# EAGLE board Z21 MEGA_2 (EAGLE 6.6.0)
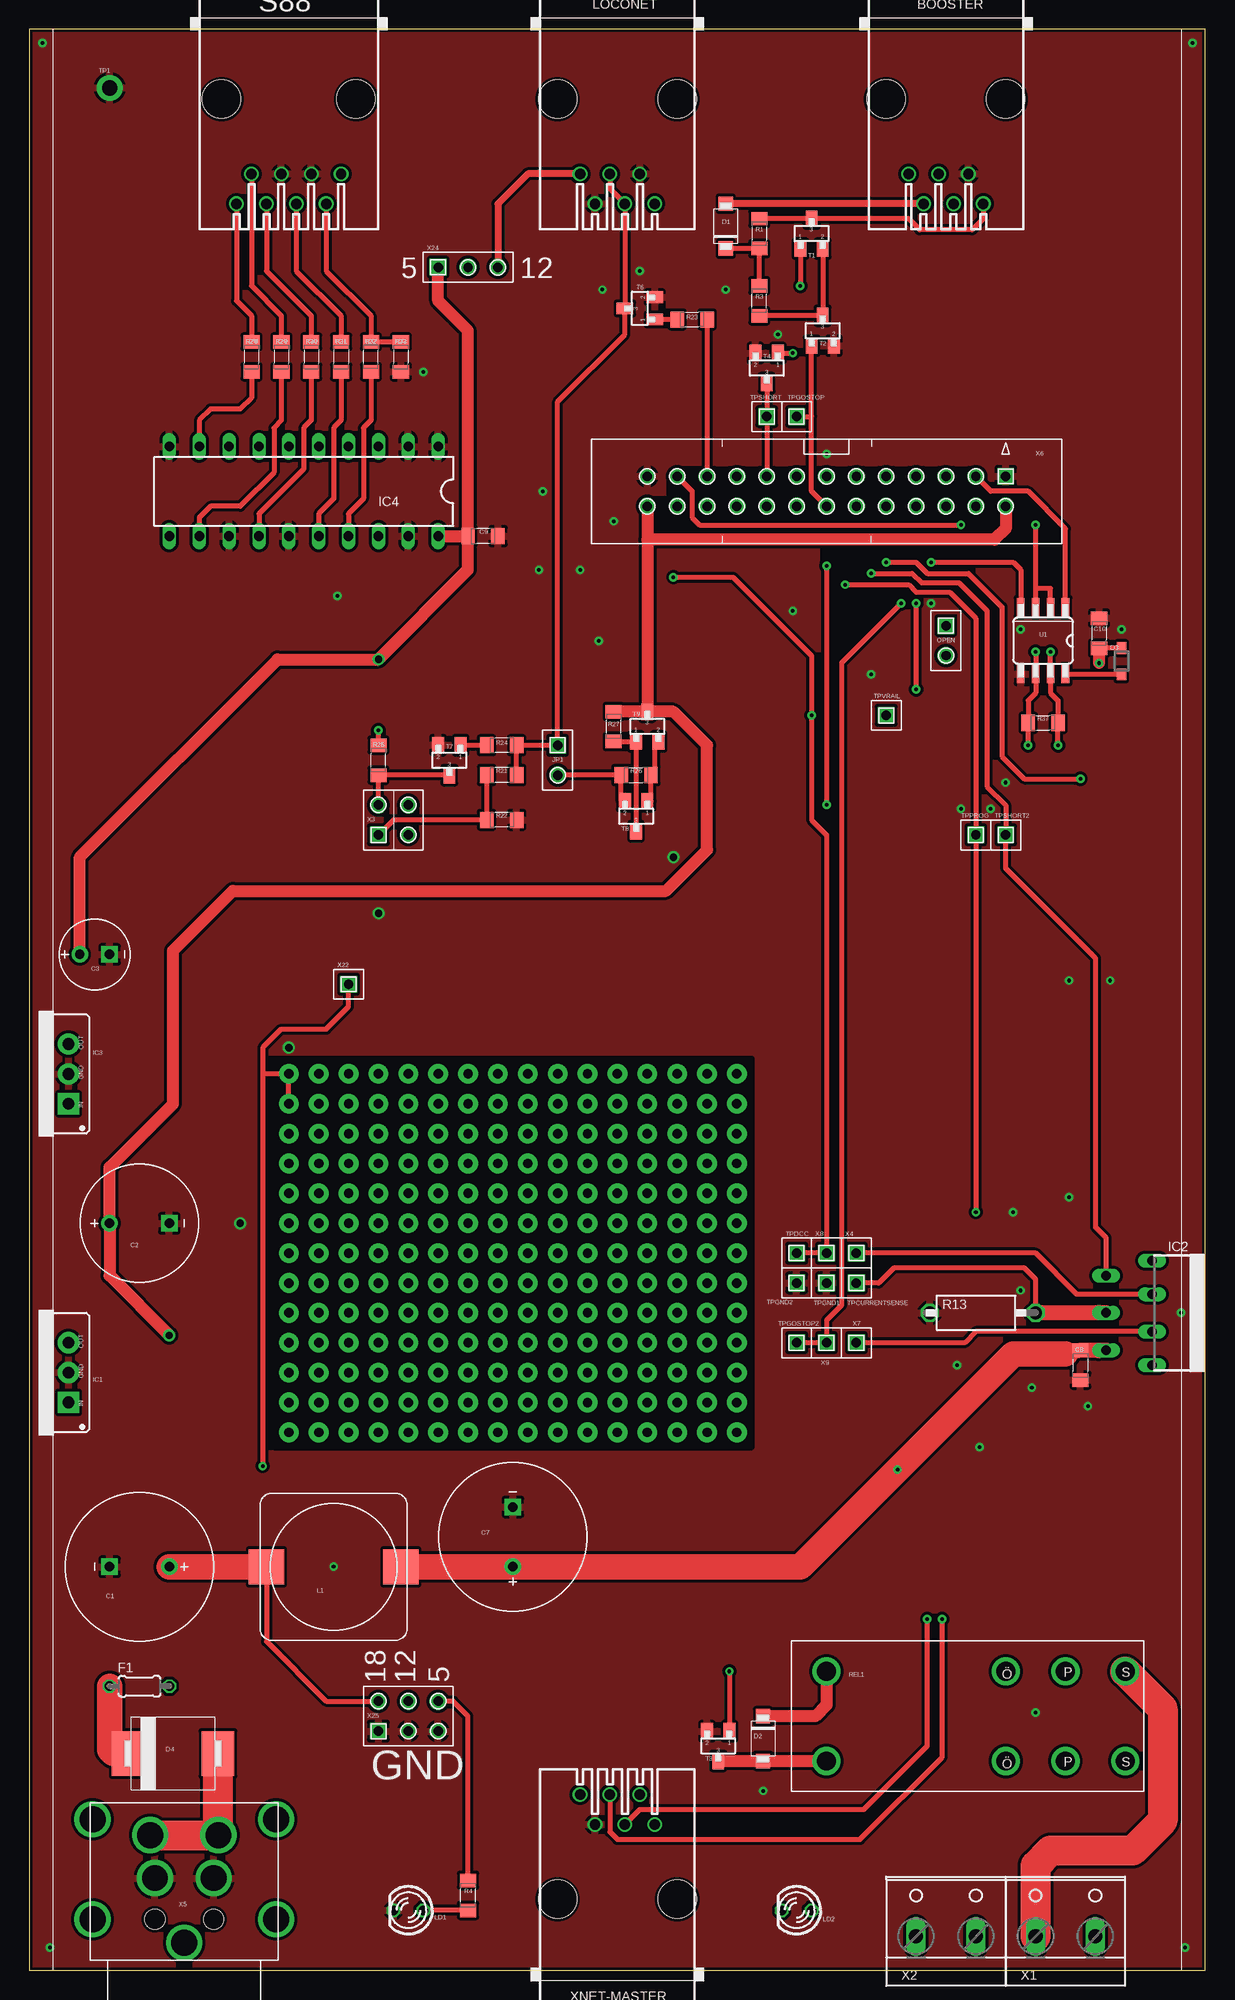
[diagram p0: board, top side]
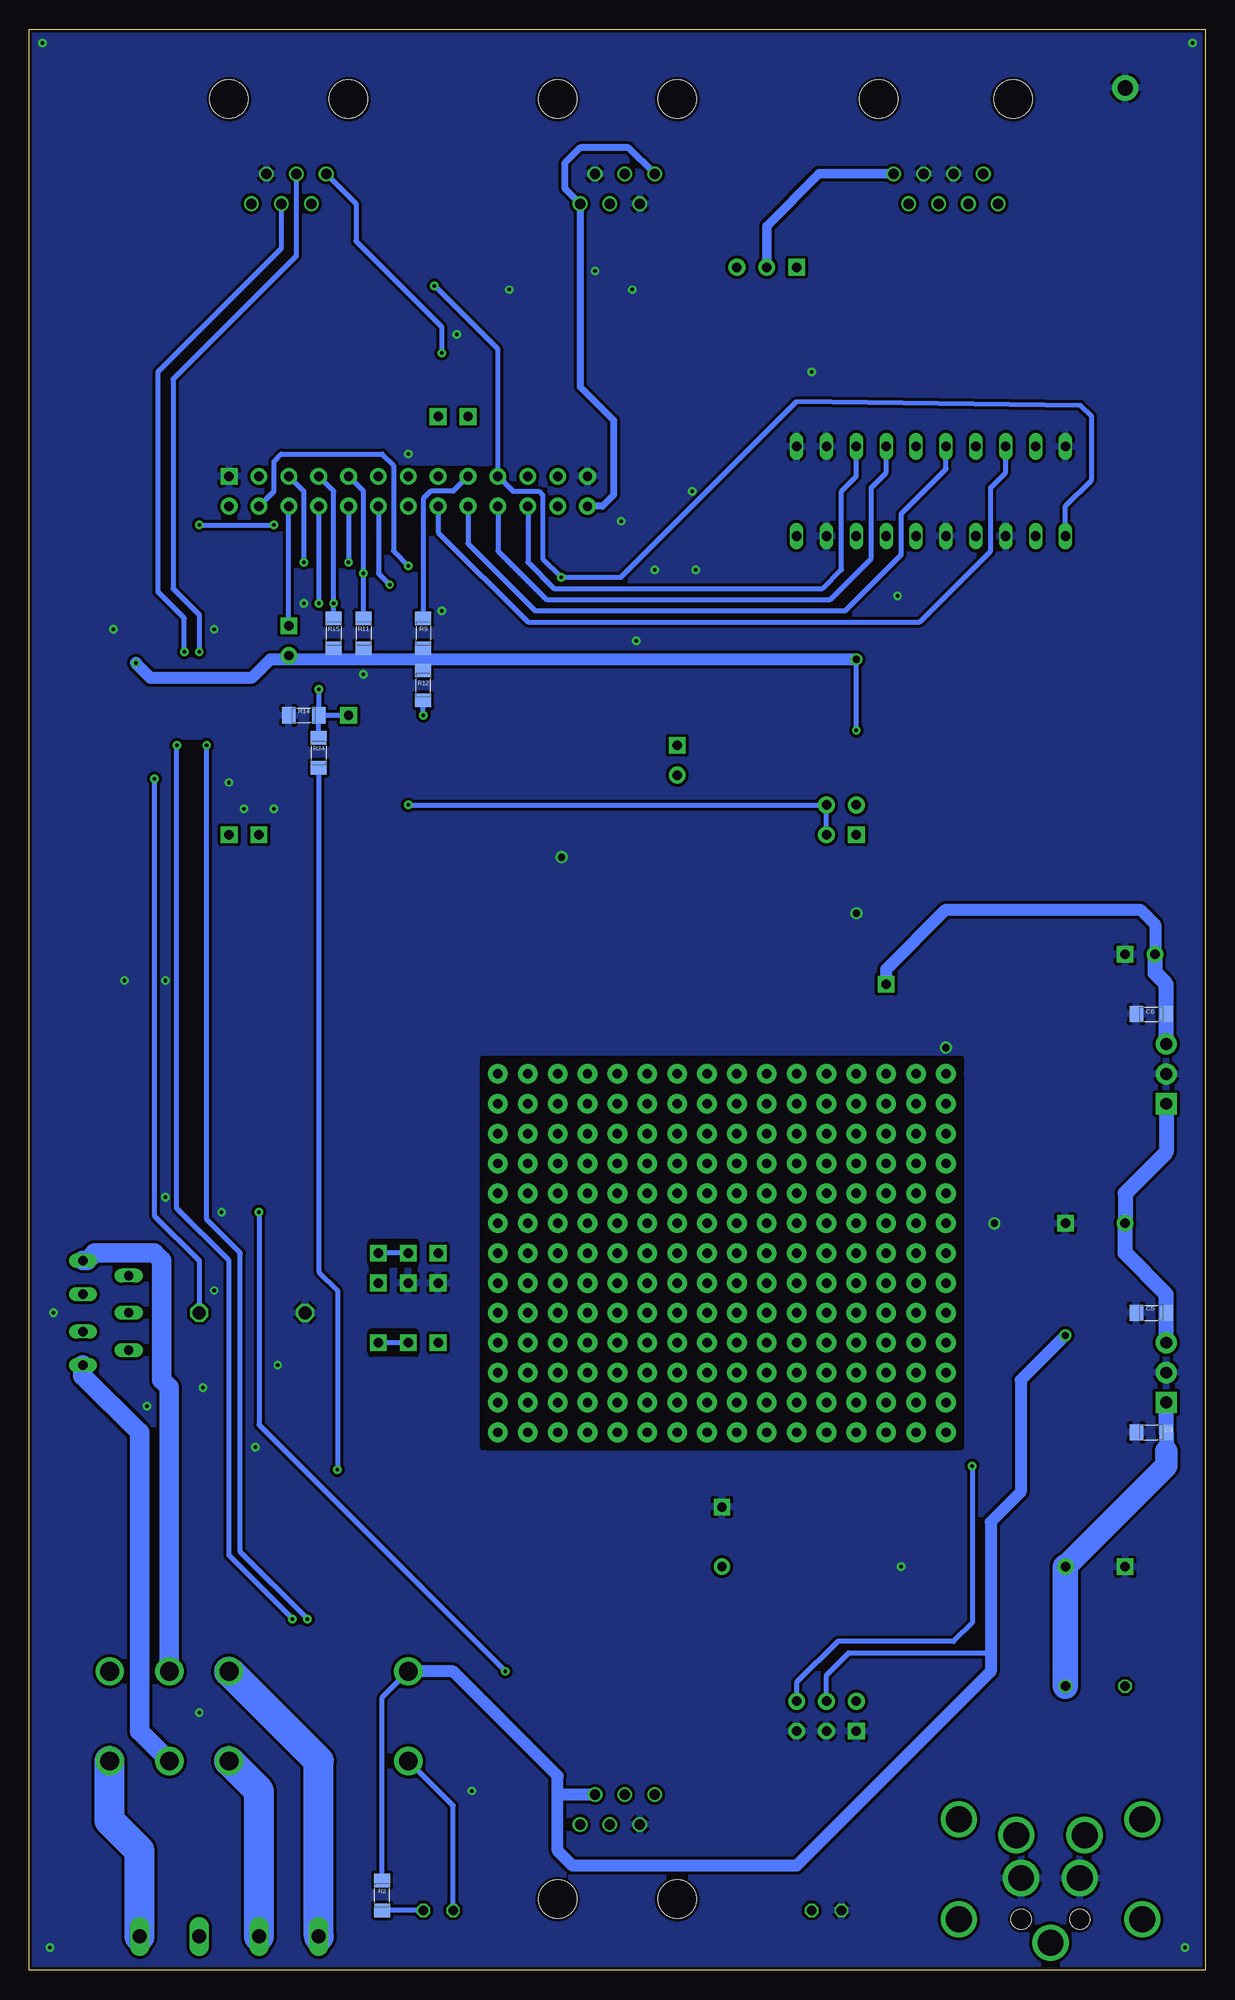
[diagram p1: board, bottom side, seen from below]

Size 100 x 165 mm. Coordinates in mm from the lower left corner, seen from the top.
Outline: 0,0 100,0 100,165 0,165 0,0
Copper layers (1*16): Top 0.035mm / dielectric 1.5mm / Bottom 0.035mm
Design rules "mme-pcb_Doppelseitig": minimum track width 6mil, minimum drill 0.3mm, track to track 6mil, track to pad 6mil, pad to pad 6mil, via to via 6mil, smd to smd 0mil, copper to edge 8mil, drill to drill 8mil, minimum pad ring 6mil, minimum via ring 8mil, stop-mask expansion 4mil, vias tented up to drill 30mil, thermal gap 10mil
tRestrict: 17 lines
bRestrict: 13 lines

## Footprints (pad centres in the part's own frame; a part is rotated, then mirrored left to right if it is on the bottom)
520250-3 = drill 0.889: 1 -3.175,8.89; 2 -1.905,6.35; 3 -0.635,8.89; 4 0.635,6.35; 5 1.905,8.89; 6 3.175,6.35 | hole 3.251: -5.08,0; 5.08,0
RM5_DIA12.5 = drill 0.8 pad 1.4 square: MINUS 0,-2.54 | drill 0.8 pad 1.4: PLUS 0,2.54
RM5_DIA10 = drill 0.8 pad 1.4 square: MINUS 0,-2.54 | drill 0.8 pad 1.4: PLUS 0,2.54
RM2.5_DIA6 = drill 0.8 pad 1.4 square: MINUS 0,0 | drill 0.8 pad 1.4: PLUS 0,2.54
C0805 = smd 1.143 x 1.372: 1 -1.27,0; 2 1.27,0
SUB-SMA_ = smd 1.219 x 1.219: A -1.905,0; K 1.905,0
SOD323_ = smd 1 x 0.8: ANODE 1.111,0; KATHODE -1.111,0
SMC_ = smd 2.8 x 3.8: A 3.81,0; K -3.81,0
0204/5 = drill 0.813 octagon: 1 -2.54,0; 2 2.54,0
78XXS = drill 1 pad 1.8: GND 0,0; OUT 2.54,0 | drill 1 pad 1.8 square: IN -2.54,0
P-TO220-7-11 = drill 0.8 pad 1.2 long: 1 -4.445,-1.85; 2 -3.175,-5.75; 3 -1.587,-1.85; 4 0,-5.75; 5 1.587,-1.85; 6 3.175,-5.75; 7 4.445,-1.85
DIL20 = drill 0.813 long: 1 -11.43,-3.81; 2 -8.89,-3.81; 3 -6.35,-3.81; 4 -3.81,-3.81; 5 -1.27,-3.81; 6 1.27,-3.81; 7 3.81,-3.81; 8 6.35,-3.81; 9 8.89,-3.81; 10 11.43,-3.81; 11 11.43,3.81; 12 8.89,3.81; 13 6.35,3.81; 14 3.81,3.81; 15 1.27,3.81; 16 -1.27,3.81; 17 -3.81,3.81; 18 -6.35,3.81; 19 -8.89,3.81; 20 -11.43,3.81
1X02_2.54MM = drill 0.8 pad 1.422 square: P$1 0,0 | drill 0.8 pad 1.422: P$2 2.54,0
12,5X12,5MM = smd 3 x 3: P$1 0,5.715; P$2 0,-5.715
LED3MM_ = drill 0.813 octagon: A -1.27,0; K 1.27,0
R0805 = smd 1.143 x 1.372: P$1 -1.27,0; P$2 1.27,0
VMTA55 = drill 1.1 octagon: 1 -5.08,0; 2 3.92,0
FINDER_40.527 = drill 1.6 pad 2.4: P1 20.32,-3.81; P2 20.32,3.81; S1 25.4,-3.81; S2 25.4,3.81; SP1 0,3.81; SP2 0,-3.81; Ö1 15.24,-3.81; Ö2 15.24,3.81
520251-4 = drill 0.889: 1 -4.445,6.35; 2 -3.175,8.89; 3 -1.905,6.35; 4 -0.635,8.89; 5 0.635,6.35; 6 1.905,8.89; 7 3.175,6.35; 8 4.445,8.89 | hole 3.251: -5.715,0; 5.715,0
SOT23_ = smd 1 x 1.4: 1 -0.953,-1.27; 2 0.953,-1.27; 3 0,1.27
THT_1.3MM_51.2MIL = drill 1.3 pad 2.2: P$1 0,0
1X01_2.54MM = drill 0.8 pad 1.422 square: P$1 0,0
SO8__ = smd 0.66 x 1.524: 1 -1.905,-2.857; 2 -0.635,-2.857; 3 0.635,-2.857; 4 1.905,-2.857; 5 1.905,2.857; 6 0.635,2.857; 7 -0.635,2.857; 8 -1.905,2.857
W237-132 = drill 1.194 long: 1 -2.54,-0.635; 2 2.54,-0.635
2X02_2.54MM = drill 0.8 pad 1.422 square: P$1 0,0 | drill 0.8 pad 1.422: P$2 0,2.54; P$3 2.54,0; P$4 2.54,2.54
MDINBU4-POWER = drill 2.2 pad 3: 1 2.9,-14.65; 2 -2.9,-14.65; 3 2.5,-11; 4 -2.5,-11; GND@1 0,-5.5; GND@2 7.8,-7.5; GND@3 -7.8,-7.5; GND@4 7.8,-16; GND@5 -7.8,-16 | hole 1.7: 2.5,-7.5; -2.5,-7.5
2X13_WANNE_180° = drill 0.8 pad 1.422 square: P$1 0,0 | drill 0.8 pad 1.422: P$2 0,2.54; P$3 2.54,0; P$4 2.54,2.54; P$5 5.08,0; P$6 5.08,2.54; P$7 7.62,0; P$8 7.62,2.54; P$9 10.16,0; P$10 10.16,2.54; P$11 12.7,0; P$12 12.7,2.54; P$13 15.24,0; P$14 15.24,2.54; P$15 17.78,0; P$16 17.78,2.54; P$17 20.32,0; P$18 20.32,2.54; P$19 22.86,0; P$20 22.86,2.54; P$21 25.4,0; P$22 25.4,2.54; P$23 27.94,0; P$24 27.94,2.54; P$25 30.48,0; P$26 30.48,2.54
1X03_2.54MM = drill 0.8 pad 1.422 square: P$1 0,0 | drill 0.8 pad 1.422: P$2 2.54,0; P$3 5.08,0
2X03_2.54MM = drill 0.8 pad 1.422 square: P$1 0,0 | drill 0.8 pad 1.422: P$2 0,2.54; P$3 2.54,0; P$4 2.54,2.54; P$5 5.08,0; P$6 5.08,2.54

## Placement (x,y rotation side)
BOOSTER  [520250-3]  77.94,159.07 180 top
C1  1000µ  [RM5_DIA12.5]  9.36,34.29 270 top
C2  470µ  [RM5_DIA10]  9.36,63.5 90 top
C3  100µ  [RM2.5_DIA6]  6.82,86.36 90 top
C4  1µ/50V  [C0805]  4.6,45.72 0 bottom
C5  1µ  [C0805]  4.6,55.88 0 bottom
C6  1µ  [C0805]  4.6,81.28 0 bottom
C7  1000µ  [RM5_DIA12.5]  41.11,36.83 180 top
C8  1µ/50V  [C0805]  89.37,51.44 270 top
C9  100n  [C0805]  38.57,121.92 180 top
C10  100n  [C0805]  90.96,113.67 270 top
D1  SS14L  [SUB-SMA_]  59.21,148.27 270 top
D2  SS14L  [SUB-SMA_]  62.38,19.68 90 top
D3  1N4148  [SOD323_]  92.86,111.28 90 top
D4  SK86  [SMC_]  12.22,18.41 0 top
F1  4A  [0204/5]  9.36,24.13 180 top
IC1  7812  [78XXS]  3.33,50.8 90 top
IC2  TLE5206-2  [P-TO220-7-11]  97.31,55.88 270 top
IC3  7805  [78XXS]  3.33,76.2 90 top
IC4  74HC244N  [DIL20]  23.33,125.73 180 top
JP1  1X02_JUMPER_2.54MM  [1X02_2.54MM]  44.92,104.14 270 top
L1  10µH/5,4A  [12,5X12,5MM]  25.87,34.29 270 top
LD1  gn  [LED3MM_]  32.22,5.08 180 top
LD2  ge  [LED3MM_]  65.24,5.08 180 top
LOCONET  [520250-3]  50,159.07 180 top
OPEN  1X02_JUMPER_2.54MM  [1X02_2.54MM]  77.94,114.3 270 top
R1  2,2k  [R0805]  62.06,147.64 270 top
R2  4,7k  [R0805]  70,6.35 90 bottom
R3  10k  [R0805]  62.06,141.92 90 top
R4  1k  [R0805]  37.3,6.35 90 top
R9  10k  [R0805]  66.51,113.67 270 bottom
R11  10k  [R0805]  71.59,113.67 270 bottom
R12  10k  [R0805]  66.51,109.22 90 bottom
R13  0R33 5W  [VMTA55]  80.48,55.88 180 top
R14  4,7k  [R0805]  76.67,106.68 0 bottom
R15  10k  [R0805]  74.13,113.67 270 bottom
R21  100k  [R0805]  40.16,101.6 180 top
R22  47k  [R0805]  40.16,97.79 180 top
R23  100k  [R0805]  56.35,140.34 0 top
R24  10k  [R0805]  40.16,104.14 180 top
R25  470R  [R0805]  29.68,102.87 90 top
R26  47R  [R0805]  51.59,101.6 0 top
R27  10k  [R0805]  49.68,105.73 90 top
R28  47R  [R0805]  18.89,137.16 270 top
R29  47R  [R0805]  21.43,137.16 270 top
R30  47R  [R0805]  23.96,137.16 270 top
R31  47R  [R0805]  26.5,137.16 270 top
R32  47R  [R0805]  29.05,137.16 90 top
R33  10k  [R0805]  31.59,137.16 270 top
R34  100k  [R0805]  75.4,103.5 270 bottom
R37  n.m.  [R0805]  86.19,106.05 0 top
REL1  DIL16_1FINDER_40.527  [FINDER_40.527]  67.78,21.59 0 top
S88  [520251-4]  22.06,159.07 180 top
T1  PDTC143ZT  [SOT23_]  66.51,147.64 0 top
T2  PDTC143ZT  [SOT23_]  67.46,139.38 0 top
T3  PDTC143ZT  [SOT23_]  58.57,19.05 180 top
T4  PDTC143ZT  [SOT23_]  62.7,136.21 180 top
T6  BC847  [SOT23_]  51.91,141.29 90 top
T7  BC847  [SOT23_]  35.71,102.87 180 top
T8  BC847  [SOT23_]  51.59,98.11 180 top
T9  BC847  [SOT23_]  52.54,105.73 0 top
TP1  LÖTPUNKTTHT_1.3MM_51.2MIL  [THT_1.3MM_51.2MIL]  6.82,160.02 0 top
TPCURRENTSENSE  1X01_2.54MM  [1X01_2.54MM]  70.32,58.42 180 top
TPDCC  1X01_2.54MM  [1X01_2.54MM]  65.24,60.96 0 top
TPGND1  1X01_2.54MM  [1X01_2.54MM]  67.78,58.42 180 top
TPGND2  1X01_2.54MM  [1X01_2.54MM]  65.24,58.42 180 top
TPGOSTOP  1X01_2.54MM  [1X01_2.54MM]  65.24,132.08 0 top
TPGOSTOP2  1X01_2.54MM  [1X01_2.54MM]  65.24,53.34 0 top
TPPROG  1X01_2.54MM  [1X01_2.54MM]  80.48,96.52 0 top
TPSHORT  1X01_2.54MM  [1X01_2.54MM]  62.7,132.08 0 top
TPSHORT2  1X01_2.54MM  [1X01_2.54MM]  83.02,96.52 0 top
TPVRAIL  1X01_2.54MM  [1X01_2.54MM]  72.86,106.68 0 top
U1  SP485  [SO8__]  86.19,113.03 180 top
X1  PROG OUT  [W237-132]  88.1,3.49 0 top
X2  TRACK OUT  [W237-132]  77.94,3.49 0 top
X3  2X02_2.54MM  [2X02_2.54MM]  29.68,96.52 0 top
X4  1X01_2.54MM  [1X01_2.54MM]  70.32,60.96 0 top
X5  [MDINBU4-POWER]  13.17,-3.17 180 top
X6  2X13_WANNE_180°  [2X13_WANNE_180°]  83.02,127 180 top
X7  1X01_2.54MM  [1X01_2.54MM]  70.32,53.34 0 top
X8  1X01_2.54MM  [1X01_2.54MM]  67.78,60.96 0 top
X9  1X01_2.54MM  [1X01_2.54MM]  67.78,53.34 0 top
X22  1X01_2.54MM  [1X01_2.54MM]  27.14,83.82 0 top
X24  [1X03_2.54MM]  34.76,144.78 0 top
X25  2X03_2.54MM  [2X03_2.54MM]  29.68,20.32 0 top
XNET-MASTER  [520250-3]  50,6.03 0 top

## Library data of the parts
BOOSTER LOCONET S88 XNET-MASTER = con-amp
C1-C3 C7 = C-Elko
C4-C6 C8-C10 = C
D1-D4 = Dioden
F1 R13 = rcl
IC1 IC3 = Spannungsregler
IC2 = infineon; OC_FARNELL: unknown; OC_NEWARK: unknown
IC4 = 74xx-eu
JP1 OPEN TPCURRENTSENSE TPDCC TPGND1 TPGND2 TPGOSTOP TPGOSTOP2 TPPROG TPSHORT TPSHORT2 TPVRAIL X3 X4 X7-X9 X22 X24 X25 = Stiftleisten
L1 = L
LD1 LD2 = LEDs
R1-R4 R9 R11 R12 R14 R15 R21-R34 R37 = R
REL1 = Relais
T1-T4 T6-T9 = Transistoren
TP1 = Lötpunkte
U1 = RS485
X1 X2 = con-wago-508; OC_FARNELL: unknown; OC_NEWARK: unknown
X5 = Mini-DIN-Power
X6 = Z21-Connector

## Nets
+5V: C3.PLUS C6.2 C9.2 C10.2 D3.ANODE IC3.OUT IC4.20 OPEN.P$2 R4.P$2 R9.P$2 R11.P$2 R12.P$2 R15.P$2 R25.P$2 X22.P$1 X24.P$1 X25.P$6
+12V: C2.PLUS C5.2 D2.K IC1.OUT IC3.IN LOCONET.1 LOCONET.6 R2.P$2 R27.P$2 REL1.SP1 T9.3 X6.P$2 X6.P$26 X24.P$3 X25.P$4 XNET-MASTER.5
+18V: C1.PLUS C4.2 F1.1 IC1.IN L1.P$2 X25.P$2
CLOCK: R31.P$1 S88.4
CS: X6.P$24
CURRENT_SENSE: IC2.4 R13.1 TPCURRENTSENSE.P$1 X6.P$10
DCC: IC2.3 IC4.11 R12.P$1 T1.1 TPDCC.P$1 X4.P$1 X6.P$19 X8.P$1
DCC_IN: X6.P$13
DCC_STATUS: X6.P$15
GND: BOOSTER.2 C1.MINUS C2.MINUS C3.MINUS C4.1 C5.1 C6.1 C7.MINUS C8.2 C9.1 C10.1 IC1.GND IC3.GND IC4.1 IC4.2 IC4.10 IC4.13 IC4.15 IC4.19 LD1.K LOCONET.2 LOCONET.5 R13.2 R14.P$1 R22.P$1 R33.P$2 S88.3 S88.5 T2.2 T3.2 T4.2 T6.2 T7.2 TP1.P$1 TPGND1.P$1 TPGND2.P$1 U1.5 X5.3 X5.4 X6.P$1 X6.P$25 X25.P$1 X25.P$3 X25.P$5 XNET-MASTER.2
GO/STOP: T2.1 TPGOSTOP.P$1 X6.P$14
GO/STOP2: IC2.5 R15.P$1 TPGOSTOP2.P$1 X6.P$7 X7.P$1 X9.P$1
LN_DATA: JP1.P$1 LOCONET.3 LOCONET.4 R21.P$1 R24.P$1 T6.3
LN_IN: R21.P$2 R22.P$2 X3.P$1
LN_OUT: R23.P$2 X6.P$21
LN_RECEIVE: X3.P$3 X3.P$4 X6.P$4
N$1: OPEN.P$1 X6.P$6
N$2: D1.K R1.P$2 R3.P$2
N$3: IC2.7 REL1.P1
N$4: IC2.1 REL1.P2
N$5: R3.P$1 T1.2 T2.3
N$6: REL1.Ö2 X2.1
N$7: D4.K F1.2
N$8: D4.A X5.1 X5.2
N$9: C7.PLUS C8.1 IC2.6 L1.P$1 R34.P$2
N$12: D3.KATHODE U1.8
N$13: D2.A LD2.K REL1.SP2 T3.3
N$15: REL1.Ö1 X2.2
N$17: REL1.S2 X1.1
N$18: REL1.S1 X1.2
N$26: R26.P$2 T8.1 T9.2
N$27: R23.P$1 T6.1
N$28: R24.P$2 T7.1
N$29: R27.P$1 T8.3 T9.1
N$30: IC4.9 R28.P$2
N$31: IC4.14 R30.P$2
N$32: IC4.16 R31.P$2
N$33: IC4.12 R29.P$2
N$35: R32.P$2 R33.P$1 S88.2
N$36: JP1.P$2 R26.P$1 T8.2
N$40: S88.1 X24.P$2
N$47: BOOSTER.6 T4.1
N$48: BOOSTER.1 R1.P$1 T1.3
N$52: LD2.A R2.P$1
N$159: LD1.A R4.P$1
N$227: R25.P$1 T7.3 X3.P$2
N$238: BOOSTER.5 D1.A
PROG: T3.1 TPPROG.P$1 X6.P$12
PS/LOAD: R30.P$1 S88.6
RAILCOM: X6.P$11
RAILDATA: R28.P$1 S88.8
RESET_S: R29.P$1 S88.7
SCLOCK: IC4.4 X6.P$20
SD_IN: IC4.17 R32.P$1
SDATA: IC4.3 X6.P$22
SHORT: R9.P$1 T4.3 TPSHORT.P$1 X6.P$17
SHORT2: IC2.2 R11.P$1 TPSHORT2.P$1 X6.P$9
SPS/LOAD: IC4.6 X6.P$18
SRESET: IC4.8 X6.P$16
V_RAIL: R14.P$2 R34.P$1 TPVRAIL.P$1 X6.P$8
XNET_A: BOOSTER.4 R37.P$1 U1.6 XNET-MASTER.4
XNET_B: BOOSTER.3 R37.P$2 U1.7 XNET-MASTER.3
XNET_RX: U1.1 X6.P$3
XNET_S/R: U1.2 U1.3 X6.P$23
XNET_TX: U1.4 X6.P$5

## Tracks (layer width: path | path; a pad name or v marks a point on that pad's centre or on a via)
+5V  (via drill 0.3 pad 0.61, 0.61 pad 0.81, 0.8 pad 1.68)
  Top 0.406: R25.P$2 v29.68,105.41 | D3.ANODE C10.2 | C10.2 | 19.84,76.2 19.84,78.42 21.43,80.01 25.23,80.01 27.14,81.92 X22.P$1 | 19.84,76.2 v19.84,42.86 | v22.06,73.66 v22.06,76.2 19.84,76.2 | R4.P$2 37.3,21.59 36.03,22.86 X25.P$6
  Top 1.016: IC4.20 C9.2 | C3.PLUS 4.28,94.61 21.11,111.44 v29.68,111.44 37.3,119.06 C9.2 | v90.96,111.12 C10.2 | C9.2 37.3,139.38 34.76,141.92 X24.P$1
  Bottom 0.406: v29.68,105.41 v29.68,111.44 | v19.84,42.86 19.84,29.53 21.43,27.94 31.27,27.94 34.76,24.45 X25.P$6
  Bottom 1.016: X22.P$1 27.14,85.09 22.06,90.17 5.55,90.17 4.28,88.9 C3.PLUS | v29.68,111.44 66.51,111.44 | 66.51,111.44 71.59,111.44 | 71.59,111.44 74.13,111.44 | 74.13,111.44 77.62,111.44 | 77.62,111.44 79.53,111.44 81.11,109.86 89.69,109.86 v90.96,111.12 | R9.P$2 66.51,111.44 | R11.P$2 71.59,111.44 | R15.P$2 74.13,111.44 | OPEN.P$2 77.62,111.44 | R12.P$2 66.51,111.44
  Bottom 1.27: IC3.OUT C6.2 3.33,83.82 4.28,84.77 C3.PLUS
+12V  (via drill 0.61 pad 0.81)
  Top 0.61: LOCONET.6 42.38,152.72 39.84,150.18 X24.P$3
  Top 1.016: REL1.SP1 67.78,22.54 66.83,21.59 D2.K | v11.9,53.98 6.82,59.05 C2.PLUS 6.82,68.26 12.22,73.66 12.22,86.68 17.3,91.76 54.13,91.76 57.62,95.25 57.62,104.14 54.76,107 T9.3 | T9.3 R27.P$2 | X6.P$26 52.54,121.6 | 52.54,121.6 T9.3 | X6.P$2 83.02,122.56 82.07,121.6 52.54,121.6
  Bottom 0.406: X25.P$4 32.22,25.08 30.32,26.99 18.25,26.99 | R2.P$2 70,23.18 REL1.SP1
  Bottom 0.61: LOCONET.6 49.05,154.94 53.17,154.94 54.45,153.67 54.45,151.45 LOCONET.1 53.17,134.62 50.32,131.76 50.32,125.41 51.27,124.46 X6.P$26
  Bottom 1.016: v11.9,53.98 15.71,50.16 15.71,40.64 18.25,38.1 18.25,26.99 18.25,25.4 34.76,8.89 53.81,8.89 55.08,10.16 55.08,14.92 | XNET-MASTER.5 55.08,14.92 | 55.08,14.92 55.08,16.51 63.97,25.4 REL1.SP1
  Bottom 1.27: IC1.OUT C5.2 3.33,57.47 6.82,60.96 C2.PLUS 6.82,66.04 3.33,69.53 IC3.IN
+18V
  Top 0.406: L1.P$2 20.16,27.94 25.23,22.86 X25.P$2
  Top 2.184: L1.P$2 C1.PLUS
  Bottom 1.27: 3.33,44.13 C4.2 IC1.IN
  Bottom 1.93: 3.33,44.13 3.33,42.86 C1.PLUS
  Bottom 2.184: F1.1 C1.PLUS
CLOCK
  Top 0.406: S88.4 22.7,144.46 26.5,140.65 R31.P$1
CURRENT_SENSE  (via drill 0.3 pad 0.61)
  Top 0.406: v72.86,119.7 75.4,119.7 76.35,118.75 79.84,118.75 82.7,115.89 82.7,103.19 84.61,101.28 v89.37,101.28 | R13.1 85.56,58.74 84.61,59.69 73.5,59.69 72.22,58.42 TPCURRENTSENSE.P$1
  Top 1.27: IC2.4 R13.1
  Bottom 0.406: X6.P$10 v72.86,119.7 | v89.37,101.28 89.37,64.14 85.56,60.33 R13.1
DCC  (via drill 0.3 pad 0.61)
  Top 0.406: T1.1 v65.56,143.19 | v54.76,118.43 59.84,118.43 66.51,111.76 v66.51,106.68 66.51,97.79 67.78,96.52 X8.P$1 TPDCC.P$1 | IC2.3 89.05,57.47 85.56,60.96 X4.P$1
  Bottom 0.406: IC4.11 11.9,124.46 9.68,126.68 9.68,132.08 10.63,133.03 34.76,133.35 49.68,118.43 v54.76,118.43 56.35,120.02 56.35,125.41 56.67,125.73 58.89,125.73 X6.P$19 60.16,137.79 v65.56,143.19 | v66.51,106.68 R12.P$1 | X8.P$1 X4.P$1
GND  (via drill 0.3 pad 0.61, 0.61 pad 0.81)
  other vias: 98.26,1.91 1.74,1.91 1.1,163.83 98.9,163.83 81.75,98.74 83.02,100.97 91.91,84.14 25.87,34.29 62.38,15.24 85.56,21.91 97.94,55.88 84.29,57.78 88.42,65.72 88.42,84.14 79.21,98.74 64.92,115.57 49.68,123.19 46.83,119.06 43.33,119.06 43.65,125.73 33.49,135.89 26.19,116.84 63.65,139.06 59.21,142.88 48.73,142.88 51.91,144.46 48.41,113.03 71.59,110.17 84.29,113.98 92.86,113.98 85.24,49.53 90,47.94 80.8,44.45 83.66,64.45 29.68,89.85 54.76,94.61 78.89,51.44 76.67,116.2 67.78,128.91 17.93,63.5 22.06,78.42
  pour Top (isolate 0.254): 0,165 100,165 100,0 0,0
  pour Bottom (isolate 0.254): 0,165 100,165 100,0 0,0
GO/STOP
  Top 0.406: X6.P$14 66.51,125.73 66.51,132.08 | 66.51,132.08 T2.1 | TPGOSTOP.P$1 66.51,132.08
GO/STOP2  (via drill 0.3 pad 0.61)
  Top 0.406: v74.13,116.2 69.05,111.12 69.05,56.52 67.78,55.24 X9.P$1 TPGOSTOP2.P$1 | IC2.5 80.48,54.29 79.53,53.34 X7.P$1
  Bottom 0.406: X6.P$7 74.13,125.73 v74.13,116.2 R15.P$1 | X9.P$1 X7.P$1
LN_DATA
  Top 0.406: R21.P$1 R24.P$1 JP1.P$1 44.92,133.35 50.63,139.06 T6.3 LOCONET.3 49.37,151.45 LOCONET.4
LN_IN
  Top 0.406: X3.P$1 30.95,97.79 R22.P$2 R21.P$2
LN_OUT
  Top 0.406: R23.P$2 X6.P$21
LN_RECEIVE  (via drill 0.3 pad 0.61)
  Top 0.406: v67.78,119.38 v67.78,99.06
  Bottom 0.406: X3.P$3 X3.P$4 v67.78,99.06 | X6.P$4 79.21,125.73 79.21,128.27 78.58,128.91 70,128.91 69.05,127.95 69.05,120.65 v67.78,119.38
N$1
  Bottom 0.406: OPEN.P$1 X6.P$6
N$2
  Top 0.406: R3.P$2 R1.P$2 D1.K
N$3
  Bottom 1.676: REL1.P1 90.64,20.32 90.64,45.72 95.46,50.54 IC2.7
N$4
  Bottom 1.676: REL1.P2 88.1,49.53 88.73,50.16 88.73,60.33 89.37,60.96 94.45,60.96 95.09,60.33 IC2.1
N$5
  Top 0.406: T1.2 T2.3 R3.P$1
N$6
  Bottom 2.54: X2.1 75.4,17.78 REL1.Ö2
N$7
  Top 2.184: F1.2 6.82,18.73 7.14,18.41 D4.K
N$8
  Top 2.54: X5.1 X5.2 16.07,18.37 D4.A
N$9  (via drill 0.3 pad 0.61)
  Top 1.27: IC2.6 90.92,52.67 90.96,52.7 C8.1 88.1,52.39
  Top 2.184: L1.P$1 C7.PLUS 65.56,34.29 v73.81,42.55 83.66,52.39 88.1,52.39
  Bottom 0.406: R34.P$2 75.4,59.37 73.81,57.78 v73.81,42.55
N$10  (via drill 0.8 pad 1.68)
  other vias: 47.46,73.66
N$11  (via drill 0.8 pad 1.68)
  other vias: 47.46,76.2
N$12
  Top 0.406: U1.8 D3.KATHODE | D3.KATHODE
N$13
  Top 1.016: T3.3 D2.A REL1.SP2
  Bottom 0.406: LD2.K 63.97,13.97 REL1.SP2
N$14  (via drill 0.8 pad 1.68)
  other vias: 60.16,71.12
N$15
  Bottom 2.54: X2.2 80.48,15.24 REL1.Ö1
N$16  (via drill 0.8 pad 1.68)
  other vias: 22.06,50.8
N$17
  Top 2.54: REL1.S2 96.35,22.23 96.35,12.7 93.81,10.16 86.83,10.16 85.56,8.89 X1.1
N$18
  Bottom 2.54: X1.2 90.64,10.16 93.18,12.7 REL1.S1
N$19  (via drill 0.8 pad 1.68)
  other vias: 24.6,73.66
N$20  (via drill 0.8 pad 1.68)
  other vias: 47.46,71.12
N$21  (via drill 0.8 pad 1.68)
  other vias: 44.92,71.12
N$22  (via drill 0.8 pad 1.68)
  other vias: 42.38,71.12
N$23  (via drill 0.8 pad 1.68)
  other vias: 39.84,71.12
N$24  (via drill 0.8 pad 1.68)
  other vias: 37.3,71.12
N$25  (via drill 0.8 pad 1.68)
  other vias: 34.76,71.12
N$26
  Top 0.406: T9.2 53.17,104.14 53.17,101.6 R26.P$2 52.86,99.38 T8.1
N$27
  Top 0.406: R23.P$1 T6.1
N$28
  Top 0.406: T7.1 R24.P$2
N$29
  Top 0.406: R27.P$1 T9.1 T8.3
N$30
  Top 0.406: R28.P$2 18.89,133.67 17.93,132.72 15.39,132.72 14.44,131.76 IC4.9
N$31
  Top 0.406: R30.P$2 23.96,131.76 23.33,131.13 23.33,127.64 19.52,123.83 IC4.14
N$32
  Top 0.406: R31.P$2 26.5,131.76 25.87,131.13 25.87,125.09 24.6,123.83 IC4.16
N$33
  Top 0.406: R29.P$2 21.43,131.76 20.79,131.13 20.79,127.32 17.93,124.46 15.39,124.46 14.44,123.51 IC4.12
N$34  (via drill 0.8 pad 1.68)
  other vias: 32.22,71.12
N$35
  Top 0.406: R33.P$1 R32.P$2 29.05,140.65 25.23,144.46 S88.2
N$36
  Top 0.406: T8.2 50.32,99.38 R26.P$1 JP1.P$2
N$37  (via drill 0.8 pad 1.68)
  other vias: 29.68,71.12
N$38  (via drill 0.8 pad 1.68)
  other vias: 27.14,71.12
N$39  (via drill 0.8 pad 1.68)
  other vias: 24.6,71.12
N$40
  Bottom 0.813: S88.1 32.86,152.72 37.3,148.27 X24.P$2
N$41  (via drill 0.8 pad 1.68)
  other vias: 27.14,73.66
N$42  (via drill 0.8 pad 1.68)
  other vias: 29.68,73.66
N$43  (via drill 0.8 pad 1.68)
  other vias: 32.22,73.66
N$44  (via drill 0.8 pad 1.68)
  other vias: 34.76,73.66
N$45  (via drill 0.8 pad 1.68)
  other vias: 37.3,73.66
N$46  (via drill 0.8 pad 1.68)
  other vias: 39.84,73.66
N$47  (via drill 0.3 pad 0.61)
  Top 0.406: T4.1 v64.92,137.48
  Bottom 0.406: v64.92,137.48 64.92,139.7 72.22,147 72.22,150.18 BOOSTER.6
N$48
  Top 0.406: R1.P$1 T1.3 74.77,148.91 75.72,147.96 80.16,147.96 81.11,148.91 BOOSTER.1
N$49  (via drill 0.8 pad 1.68)
  other vias: 42.38,73.66
N$50  (via drill 0.8 pad 1.68)
  other vias: 44.92,73.66
N$51  (via drill 0.8 pad 1.68)
  other vias: 60.16,73.66
N$52
  Bottom 0.406: LD2.A R2.P$1
N$53  (via drill 0.8 pad 1.68)
  other vias: 60.16,63.5
N$54  (via drill 0.8 pad 1.68)
  other vias: 47.46,63.5
N$55  (via drill 0.8 pad 1.68)
  other vias: 44.92,63.5
N$56  (via drill 0.8 pad 1.68)
  other vias: 42.38,63.5
N$57  (via drill 0.8 pad 1.68)
  other vias: 39.84,63.5
N$58  (via drill 0.8 pad 1.68)
  other vias: 37.3,63.5
N$59  (via drill 0.8 pad 1.68)
  other vias: 34.76,63.5
N$60  (via drill 0.8 pad 1.68)
  other vias: 32.22,63.5
N$61  (via drill 0.8 pad 1.68)
  other vias: 29.68,63.5
N$62  (via drill 0.8 pad 1.68)
  other vias: 27.14,63.5
N$63  (via drill 0.8 pad 1.68)
  other vias: 24.6,63.5
N$64  (via drill 0.8 pad 1.68)
  other vias: 22.06,63.5
N$65  (via drill 0.8 pad 1.68)
  other vias: 22.06,60.96
N$66  (via drill 0.8 pad 1.68)
  other vias: 24.6,60.96
N$67  (via drill 0.8 pad 1.68)
  other vias: 27.14,60.96
N$68  (via drill 0.8 pad 1.68)
  other vias: 29.68,60.96
N$69  (via drill 0.8 pad 1.68)
  other vias: 32.22,60.96
N$70  (via drill 0.8 pad 1.68)
  other vias: 34.76,60.96
N$71  (via drill 0.8 pad 1.68)
  other vias: 37.3,60.96
N$72  (via drill 0.8 pad 1.68)
  other vias: 39.84,60.96
N$73  (via drill 0.8 pad 1.68)
  other vias: 42.38,60.96
N$74  (via drill 0.8 pad 1.68)
  other vias: 44.92,60.96
N$75  (via drill 0.8 pad 1.68)
  other vias: 47.46,60.96
N$76  (via drill 0.8 pad 1.68)
  other vias: 60.16,60.96
N$77  (via drill 0.8 pad 1.68)
  other vias: 60.16,58.42
N$78  (via drill 0.8 pad 1.68)
  other vias: 47.46,58.42
N$79  (via drill 0.8 pad 1.68)
  other vias: 44.92,58.42
N$80  (via drill 0.8 pad 1.68)
  other vias: 42.38,58.42
N$81  (via drill 0.8 pad 1.68)
  other vias: 39.84,58.42
N$82  (via drill 0.8 pad 1.68)
  other vias: 37.3,58.42
N$83  (via drill 0.8 pad 1.68)
  other vias: 34.76,58.42
N$84  (via drill 0.8 pad 1.68)
  other vias: 32.22,58.42
N$85  (via drill 0.8 pad 1.68)
  other vias: 29.68,58.42
N$86  (via drill 0.8 pad 1.68)
  other vias: 27.14,58.42
N$87  (via drill 0.8 pad 1.68)
  other vias: 24.6,58.42
N$88  (via drill 0.8 pad 1.68)
  other vias: 22.06,58.42
N$89  (via drill 0.8 pad 1.68)
  other vias: 22.06,55.88
N$90  (via drill 0.8 pad 1.68)
  other vias: 24.6,55.88
N$91  (via drill 0.8 pad 1.68)
  other vias: 27.14,55.88
N$92  (via drill 0.8 pad 1.68)
  other vias: 29.68,55.88
N$93  (via drill 0.8 pad 1.68)
  other vias: 32.22,55.88
N$94  (via drill 0.8 pad 1.68)
  other vias: 34.76,55.88
N$95  (via drill 0.8 pad 1.68)
  other vias: 37.3,55.88
N$96  (via drill 0.8 pad 1.68)
  other vias: 39.84,55.88
N$97  (via drill 0.8 pad 1.68)
  other vias: 42.38,55.88
N$98  (via drill 0.8 pad 1.68)
  other vias: 47.46,55.88
N$99  (via drill 0.8 pad 1.68)
  other vias: 44.92,55.88
N$100  (via drill 0.8 pad 1.68)
  other vias: 60.16,55.88
N$101  (via drill 0.8 pad 1.68)
  other vias: 60.16,53.34
N$102  (via drill 0.8 pad 1.68)
  other vias: 47.46,53.34
N$103  (via drill 0.8 pad 1.68)
  other vias: 44.92,53.34
N$104  (via drill 0.8 pad 1.68)
  other vias: 42.38,53.34
N$105  (via drill 0.8 pad 1.68)
  other vias: 39.84,53.34
N$106  (via drill 0.8 pad 1.68)
  other vias: 37.3,53.34
N$107  (via drill 0.8 pad 1.68)
  other vias: 34.76,53.34
N$108  (via drill 0.8 pad 1.68)
  other vias: 32.22,53.34
N$109  (via drill 0.8 pad 1.68)
  other vias: 29.68,53.34
N$110  (via drill 0.8 pad 1.68)
  other vias: 27.14,53.34
N$111  (via drill 0.8 pad 1.68)
  other vias: 24.6,53.34
N$112  (via drill 0.8 pad 1.68)
  other vias: 22.06,53.34
N$113  (via drill 0.8 pad 1.68)
  other vias: 24.6,50.8
N$114  (via drill 0.8 pad 1.68)
  other vias: 27.14,50.8
N$115  (via drill 0.8 pad 1.68)
  other vias: 29.68,50.8
N$116  (via drill 0.8 pad 1.68)
  other vias: 32.22,50.8
N$117  (via drill 0.8 pad 1.68)
  other vias: 34.76,50.8
N$118  (via drill 0.8 pad 1.68)
  other vias: 37.3,50.8
N$119  (via drill 0.8 pad 1.68)
  other vias: 39.84,50.8
N$120  (via drill 0.8 pad 1.68)
  other vias: 42.38,50.8
N$121  (via drill 0.8 pad 1.68)
  other vias: 44.92,50.8
N$122  (via drill 0.8 pad 1.68)
  other vias: 47.46,50.8
N$123  (via drill 0.8 pad 1.68)
  other vias: 60.16,50.8
N$124  (via drill 0.8 pad 1.68)
  other vias: 60.16,48.26
N$125  (via drill 0.8 pad 1.68)
  other vias: 47.46,48.26
N$126  (via drill 0.8 pad 1.68)
  other vias: 44.92,48.26
N$127  (via drill 0.8 pad 1.68)
  other vias: 42.38,48.26
N$128  (via drill 0.8 pad 1.68)
  other vias: 39.84,48.26
N$129  (via drill 0.8 pad 1.68)
  other vias: 37.3,48.26
N$130  (via drill 0.8 pad 1.68)
  other vias: 34.76,48.26
N$131  (via drill 0.8 pad 1.68)
  other vias: 32.22,48.26
N$132  (via drill 0.8 pad 1.68)
  other vias: 29.68,48.26
N$133  (via drill 0.8 pad 1.68)
  other vias: 27.14,48.26
N$134  (via drill 0.8 pad 1.68)
  other vias: 24.6,48.26
N$135  (via drill 0.8 pad 1.68)
  other vias: 24.6,45.72
N$136  (via drill 0.8 pad 1.68)
  other vias: 27.14,45.72
N$137  (via drill 0.8 pad 1.68)
  other vias: 29.68,45.72
N$138  (via drill 0.8 pad 1.68)
  other vias: 32.22,45.72
N$139  (via drill 0.8 pad 1.68)
  other vias: 34.76,45.72
N$140  (via drill 0.8 pad 1.68)
  other vias: 37.3,45.72
N$141  (via drill 0.8 pad 1.68)
  other vias: 39.84,45.72
N$142  (via drill 0.8 pad 1.68)
  other vias: 42.38,45.72
N$143  (via drill 0.8 pad 1.68)
  other vias: 44.92,45.72
N$144  (via drill 0.8 pad 1.68)
  other vias: 47.46,45.72
N$145  (via drill 0.8 pad 1.68)
  other vias: 60.16,45.72
N$146  (via drill 0.8 pad 1.68)
  other vias: 22.06,48.26
N$147  (via drill 0.8 pad 1.68)
  other vias: 24.6,76.2
N$148  (via drill 0.8 pad 1.68)
  other vias: 27.14,76.2
N$149  (via drill 0.8 pad 1.68)
  other vias: 29.68,76.2
N$150  (via drill 0.8 pad 1.68)
  other vias: 32.22,76.2
N$151  (via drill 0.8 pad 1.68)
  other vias: 34.76,76.2
N$152  (via drill 0.8 pad 1.68)
  other vias: 37.3,76.2
N$153  (via drill 0.8 pad 1.68)
  other vias: 39.84,76.2
N$154  (via drill 0.8 pad 1.68)
  other vias: 42.38,76.2
N$155  (via drill 0.8 pad 1.68)
  other vias: 44.92,76.2
N$156  (via drill 0.8 pad 1.68)
  other vias: 60.16,76.2
N$157  (via drill 0.8 pad 1.68)
  other vias: 22.06,71.12
N$158  (via drill 0.8 pad 1.68)
  other vias: 22.06,45.72
N$159
  Top 0.406: R4.P$1 LD1.A
N$160  (via drill 0.8 pad 1.68)
  other vias: 22.06,68.58
N$161  (via drill 0.8 pad 1.68)
  other vias: 24.6,68.58
N$162  (via drill 0.8 pad 1.68)
  other vias: 27.14,68.58
N$163  (via drill 0.8 pad 1.68)
  other vias: 29.68,68.58
N$164  (via drill 0.8 pad 1.68)
  other vias: 32.22,68.58
N$165  (via drill 0.8 pad 1.68)
  other vias: 34.76,68.58
N$166  (via drill 0.8 pad 1.68)
  other vias: 37.3,68.58
N$167  (via drill 0.8 pad 1.68)
  other vias: 39.84,68.58
N$168  (via drill 0.8 pad 1.68)
  other vias: 42.38,68.58
N$169  (via drill 0.8 pad 1.68)
  other vias: 44.92,68.58
N$170  (via drill 0.8 pad 1.68)
  other vias: 47.46,68.58
N$171  (via drill 0.8 pad 1.68)
  other vias: 60.16,68.58
N$172  (via drill 0.8 pad 1.68)
  other vias: 60.16,66.04
N$173  (via drill 0.8 pad 1.68)
  other vias: 47.46,66.04
N$174  (via drill 0.8 pad 1.68)
  other vias: 44.92,66.04
N$175  (via drill 0.8 pad 1.68)
  other vias: 42.38,66.04
N$176  (via drill 0.8 pad 1.68)
  other vias: 39.84,66.04
N$177  (via drill 0.8 pad 1.68)
  other vias: 37.3,66.04
N$178  (via drill 0.8 pad 1.68)
  other vias: 34.76,66.04
N$179  (via drill 0.8 pad 1.68)
  other vias: 32.22,66.04
N$180  (via drill 0.8 pad 1.68)
  other vias: 29.68,66.04
N$181  (via drill 0.8 pad 1.68)
  other vias: 27.14,66.04
N$182  (via drill 0.8 pad 1.68)
  other vias: 24.6,66.04
N$183  (via drill 0.8 pad 1.68)
  other vias: 22.06,66.04
N$184  (via drill 0.8 pad 1.68)
  other vias: 50,73.66
N$185  (via drill 0.8 pad 1.68)
  other vias: 52.54,73.66
N$186  (via drill 0.8 pad 1.68)
  other vias: 55.08,73.66
N$187  (via drill 0.8 pad 1.68)
  other vias: 57.62,73.66
N$188  (via drill 0.8 pad 1.68)
  other vias: 57.62,63.5
N$189  (via drill 0.8 pad 1.68)
  other vias: 55.08,63.5
N$190  (via drill 0.8 pad 1.68)
  other vias: 52.54,63.5
N$191  (via drill 0.8 pad 1.68)
  other vias: 50,63.5
N$192  (via drill 0.8 pad 1.68)
  other vias: 50,60.96
N$193  (via drill 0.8 pad 1.68)
  other vias: 52.54,60.96
N$194  (via drill 0.8 pad 1.68)
  other vias: 55.08,60.96
N$195  (via drill 0.8 pad 1.68)
  other vias: 57.62,60.96
N$196  (via drill 0.8 pad 1.68)
  other vias: 57.62,58.42
N$197  (via drill 0.8 pad 1.68)
  other vias: 55.08,58.42
N$198  (via drill 0.8 pad 1.68)
  other vias: 52.54,58.42
N$199  (via drill 0.8 pad 1.68)
  other vias: 50,58.42
N$200  (via drill 0.8 pad 1.68)
  other vias: 50,55.88
N$201  (via drill 0.8 pad 1.68)
  other vias: 52.54,55.88
N$202  (via drill 0.8 pad 1.68)
  other vias: 57.62,55.88
N$203  (via drill 0.8 pad 1.68)
  other vias: 55.08,55.88
N$204  (via drill 0.8 pad 1.68)
  other vias: 57.62,53.34
N$205  (via drill 0.8 pad 1.68)
  other vias: 55.08,53.34
N$206  (via drill 0.8 pad 1.68)
  other vias: 52.54,53.34
N$207  (via drill 0.8 pad 1.68)
  other vias: 50,53.34
N$208  (via drill 0.8 pad 1.68)
  other vias: 50,50.8
N$209  (via drill 0.8 pad 1.68)
  other vias: 52.54,50.8
N$210  (via drill 0.8 pad 1.68)
  other vias: 55.08,50.8
N$211  (via drill 0.8 pad 1.68)
  other vias: 57.62,50.8
N$212  (via drill 0.8 pad 1.68)
  other vias: 57.62,48.26
N$213  (via drill 0.8 pad 1.68)
  other vias: 55.08,48.26
N$214  (via drill 0.8 pad 1.68)
  other vias: 52.54,48.26
N$215  (via drill 0.8 pad 1.68)
  other vias: 50,48.26
N$216  (via drill 0.8 pad 1.68)
  other vias: 50,45.72
N$217  (via drill 0.8 pad 1.68)
  other vias: 52.54,45.72
N$218  (via drill 0.8 pad 1.68)
  other vias: 55.08,45.72
N$219  (via drill 0.8 pad 1.68)
  other vias: 57.62,45.72
N$220  (via drill 0.8 pad 1.68)
  other vias: 50,76.2
N$221  (via drill 0.8 pad 1.68)
  other vias: 52.54,76.2
N$222  (via drill 0.8 pad 1.68)
  other vias: 55.08,76.2
N$223  (via drill 0.8 pad 1.68)
  other vias: 57.62,76.2
N$224  (via drill 0.8 pad 1.68)
  other vias: 57.62,71.12
N$225  (via drill 0.8 pad 1.68)
  other vias: 55.08,71.12
N$226  (via drill 0.8 pad 1.68)
  other vias: 52.54,71.12
N$227
  Top 0.406: X3.P$2 R25.P$1 T7.3
N$228  (via drill 0.8 pad 1.68)
  other vias: 50,71.12
N$229  (via drill 0.8 pad 1.68)
  other vias: 50,68.58
N$230  (via drill 0.8 pad 1.68)
  other vias: 52.54,68.58
N$231  (via drill 0.8 pad 1.68)
  other vias: 55.08,68.58
N$232  (via drill 0.8 pad 1.68)
  other vias: 57.62,68.58
N$233  (via drill 0.8 pad 1.68)
  other vias: 57.62,66.04
N$234  (via drill 0.8 pad 1.68)
  other vias: 55.08,66.04
N$235  (via drill 0.8 pad 1.68)
  other vias: 52.54,66.04
N$236  (via drill 0.8 pad 1.68)
  other vias: 50,66.04
N$238
  Top 0.61: BOOSTER.5 D1.A
PROG  (via drill 0.3 pad 0.61)
  Top 0.406: v69.37,117.79 74.77,117.79 75.4,117.16 78.26,117.16 80.48,114.94 TPPROG.P$1 v80.48,64.45 | v59.52,25.4 T3.1
  Bottom 0.406: X6.P$12 70.32,118.75 v69.37,117.79 | v80.48,64.45 80.48,46.35 v59.52,25.4
PS/LOAD
  Top 0.406: S88.6 20.16,144.46 23.96,140.65 R30.P$1
RAILDATA
  Top 0.406: S88.8 17.62,141.92 18.89,140.65 R28.P$1
RESET_S
  Top 0.406: S88.7 18.89,143.19 21.43,140.65 R29.P$1
SCLOCK
  Bottom 0.406: X6.P$20 60.16,120.65 56.03,116.52 31.9,116.52 28.41,120.02 28.41,126.05 27.14,127.32 IC4.4
SD_IN
  Top 0.406: R32.P$1 29.05,131.76 28.41,131.13 28.41,125.09 27.14,123.83 IC4.17
SDATA
  Bottom 0.406: X6.P$22 57.62,119.7 55.4,117.47 32.54,117.47 30.95,119.06 30.95,125.73 29.68,127 IC4.3
SHORT
  Top 0.406: X6.P$17 TPSHORT.P$1 T4.3
  Bottom 0.406: X6.P$17 63.97,125.73 65.88,125.73 66.51,125.09 R9.P$1
SHORT2  (via drill 0.3 pad 0.61)
  Top 0.406: v71.59,118.75 75.08,118.75 75.88,117.95 79.05,117.95 81.43,115.57 81.43,100.65 83.02,99.06 TPSHORT2.P$1 83.02,93.66 90.64,86.04 90.64,63.18 91.56,62.27 IC2.2
  Bottom 0.406: X6.P$9 71.59,125.73 v71.59,118.75 R11.P$1
SPS/LOAD
  Bottom 0.406: X6.P$18 62.7,121.28 56.98,115.57 30.63,115.57 25.87,120.33 25.87,123.83 22.06,127.64 IC4.6
SRESET
  Bottom 0.406: X6.P$16 65.24,122.24 57.62,114.62 24.28,114.62 18.25,120.65 18.25,126.05 16.98,127.32 IC4.8
V_RAIL  (via drill 0.3 pad 0.61)
  Top 0.406: v75.4,116.2 v75.4,108.9
  Bottom 0.406: X6.P$8 v75.4,116.2 | v75.4,108.9 R14.P$2 | R34.P$1 R14.P$2 | TPVRAIL.P$1 R14.P$2
XNET_A  (via drill 0.3 pad 0.61)
  Top 0.406: v85.56,112.08 U1.6 85.56,108.58 84.92,107.95 R37.P$1 v84.92,104.14 | XNET-MASTER.4 51.91,13.65 70.95,13.65 76.35,19.05 v76.35,29.84
  Bottom 0.406: BOOSTER.4 77.31,145.73 87.78,135.25 87.78,117.47 85.56,115.25 v85.56,112.08 | v76.35,29.84 82.07,35.56 82.07,60.96 84.92,63.82 v84.92,104.14
XNET_B  (via drill 0.3 pad 0.61)
  Top 0.406: v86.83,112.08 U1.7 86.83,108.58 87.47,107.95 R37.P$2 v87.47,104.14 | XNET-MASTER.3 49.37,11.75 50,11.11 70.64,11.11 77.62,18.1 v77.62,29.84
  Bottom 0.406: v86.83,112.08 86.83,114.94 89.05,117.16 89.05,135.89 78.58,146.37 BOOSTER.3 | v77.62,29.84 83.02,35.24 83.02,60.33 87.47,64.77 v87.47,104.14
XNET_RX
  Top 0.406: U1.1 88.1,122.56 84.92,125.73 81.75,125.73 X6.P$3
XNET_S/R  (via drill 0.3 pad 0.61)
  Top 0.406: X6.P$23 56.35,125.73 56.35,123.51 56.98,122.87 v79.21,122.87 | U1.3 85.56,117.47 | 85.56,117.47 v85.56,122.87 | U1.2 86.83,117.47 85.56,117.47
  Bottom 0.406: v85.56,122.87 v79.21,122.87
XNET_TX  (via drill 0.3 pad 0.61)
  Top 0.406: v76.67,119.7 83.66,119.7 84.29,119.06 U1.4
  Bottom 0.406: X6.P$5 76.67,125.73 v76.67,119.7

## Text on the board
tPlace: 5 | 12 | 18 | 12 | 5 | GND
tStop: 5 | 12 | 18 | 12 | 5 | GND
tDocu: isolieren | 165x100mm